# Altium PCB EPS_v6.PcbDoc (part 2 of 2)
Units mm, origin at the board's own origin, x right, y up, seen from the top; angles counter-clockwise.
Board outline 92.5 x 92.5 mm, 2 copper layers (Top Layer, Bottom Layer), stack 1.571 mm thick; 233 components, 118 nets, 725 pads, 167 vias.
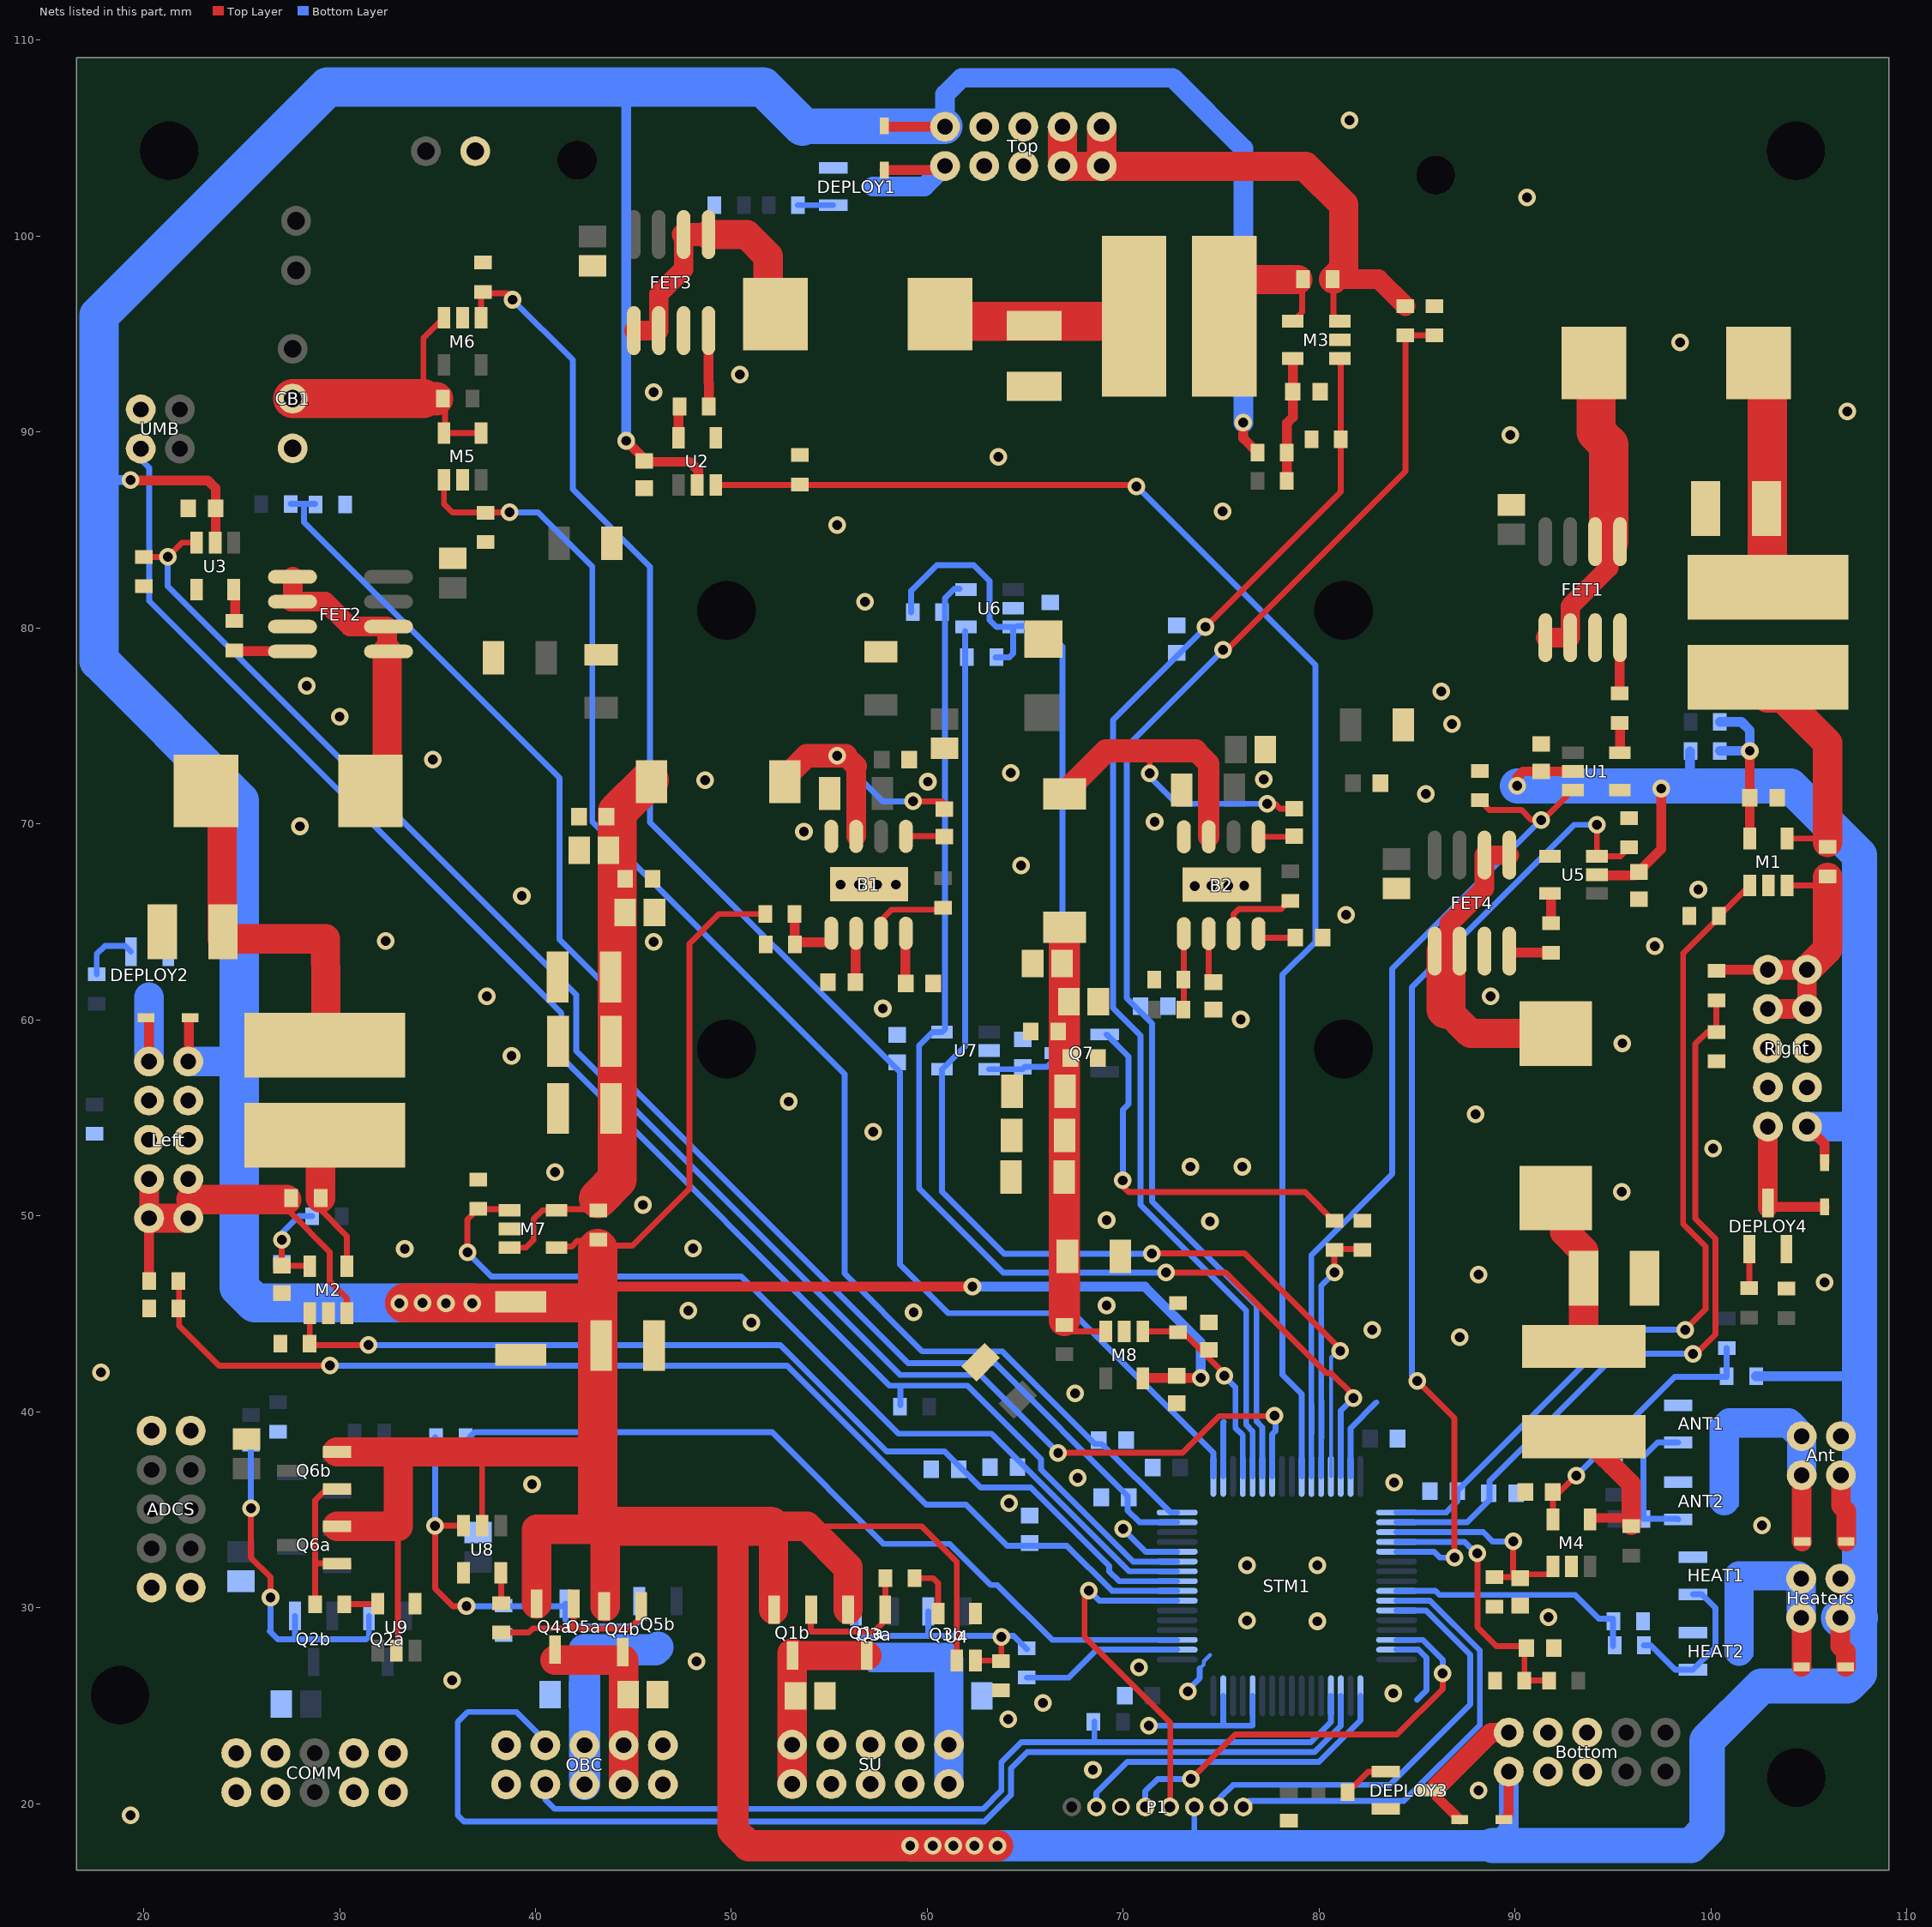
[diagram p2: the nets of this part, all layers, seen from the top]

## Via types
v1: diameter 0.9, hole 0.5, Top Layer to Bottom Layer, 167 vias

## Nets (pads, with @x,y where several pads share a name; then routed paths per layer and width w, separated by ;. In a path a pad name is that pad's centre, name@x,y a point inside that pad or via, vN(x,y) a via of type N, cw(c..) or ccw(c..) an arc to the next point about the centre after c; other vN are vias at no path point) (continued)
GND: ADCS.1 ADCS.2 ADCS.9 ADCS.10 ANT1.2 ANT2.2 B1.4 B2.4 Bottom.5 Bottom.6 Bottom.7 Bottom.8 C2.1 C4.1 C5.1 C6.1 C7.1 C8.1 C9.1 C10.1 C11.1 C12.1 C13.1 C15.1 C17.1 C19.1 C20.1 C22.1 C23.1 C24.1 C27.1 C29.1 C30.2 C31.1 C32.1 C33.1 C34.1 C35.1 C36.1 C37.1 C39.1 C41.1 C42.1 C43.1 C44.2 C45.1 C46.1 C47.1 C48.1 C49.1 C50.1 C51.2 C52.2 C53.2 C54.2 C55.2 C56.1 C57.2 C58.2 C59.1 C60.2 C61.1 C62.1 C63.1 C64.1 C65.1 C66.1 C67.1 C68.1 C69.1 C70.1 C71.1 C72.1 C73.1 C74.2 C75.2 C76.2 C77.2 C78.2 C79.1 C80.1 C81.1 C82.1 C83.1 C84.1 C85.1 C86.2 C87.2 CB1.1 CB2.2 COMM.1 COMM.2 COMM.3 COMM.4 COMM.7 COMM.8 COMM.9 COMM.10 D8.1 DEPLOY1.2 DEPLOY2.2 DEPLOY3.2 DEPLOY4.2 FET1.3 FET2.3 FET3.3 FET4.3 HEAT1.2 HEAT2.2 Left.5 Left.6 Left.7 Left.8 M1.2 M2.2 M3.2 M4.2 M5.2 M6.2 M7.2 M8.2 OBC.1 OBC.2 OBC.9 OBC.10 P1.3 R3.1 R4.2 R5.1 R11.1 R12.2 R13.1 R19.1 R20.2 R21.1 R26.1 R28.2 R29.1 R32.2 R35.1 R36.1 R38.1 R39.1 R45.1 R46.1 R47.1 R48.1 R49.1 R50.1 R51.2 R52.1 R54.2 R57.1 RFB2.1 RFB4.1 Right.5 Right.6 Right.7 Right.8 STM1.12 STM1.18 STM1.31 STM1.47 STM1.60 STM1.63 SU.3 SU.4 SU.5 SU.6 SU.7 SU.8 Top.5 Top.6 Top.7 Top.8 U1.4 U2.4 U3.4 U4.4 U5.4 U6.2 U7.2 U8.4 U9.4 UMB.4 | length 25.1
  Bottom Layer w0.2: 73.9,26.893 74.1,27.093 74.1,27.253 74.434,27.587
  Bottom Layer w0.3: v1(69.99,34.01) 71.15,32.85 STM1.12@72.75,32.85 ; v1(71.3,23.975) 75.075,23.975 ; v1(73.3,25.725) 73.3,25.8 73.9,26.4 73.9,26.893 ; STM1.63@75.1,25.5 75.1,24 75.075,23.975 ; STM1.18@75.1,36.7 75.1,39.45 75.125,39.475 ; STM1.60@76.6,25.5 76.6,23.975 75.075,23.975 ; STM1.31@81.6,36.7 81.6,39.15 82.925,40.475 ; STM1.47@83.95,27.85 85.068,27.85 85.475,27.443 85.475,25.775 85,25.3
  other v1: 19.325,19.4 88.125,20.675 68.45,21.725 64.125,24.3 65.9,25.125 83.775,25.625 35.75,26.3 70.8,26.95 48.225,27.25 79.9,29.3 76.325,29.325 91.7,29.5 76.325,32.15 79.9,32.15 102.6,34.2 64.175,35.325 39.825,36.3 83.825,36.375 67.675,36.625 67.55,40.925 17.825,42 87.175,43.8 82.7,44.175 51.025,44.55 59.3,45.075 47.8,45.15 69.15,45.425 105.8,46.6 88.125,47 33.325,48.3 48.05,48.325 74.425,49.7 69.15,49.775 45.475,50.55 95.45,51.225 41,52.225 73.425,52.5 76.075,52.5 100.1,53.425 57.225,54.275 87.975,55.175 52.925,55.825 38.775,58.15 95.475,58.8 76,60.025 57.725,60.575 37.525,61.2 88.75,61.2 97.125,63.75 46.025,63.975 32.35,64.025 81.375,65.35 39.3,66.325 99.35,66.65 73.65,66.825 74.5,66.85 75.35,66.85 76.175,66.85 55.575,66.9 56.5,66.9 57.425,66.9 58.4,66.9 64.775,67.875 53.7,69.6 27.975,69.875 71.6,70.1 85.45,71.525 60.025,72.15 48.65,72.225 77.175,72.275 64.25,72.6 34.75,73.275 86.775,75.1 30,75.475 86.225,76.75 28.325,77.05 56.825,81.325 55.4,85.25 75.075,85.95 63.625,88.725 89.75,89.85 106.95,91.05 46.025,92.025 50.425,92.925 98.425,94.575 90.6,101.975 81.55,105.9
HEATERS: R25.2 R49.2 STM1.41 | length 13
  Bottom Layer w0.3: STM1.41@83.95,30.85 85.925,30.85 86.125,30.65 93.05,30.65 94.275,29.425 95,29.425 R25.2@95,28.025
I2CRESET: R57.2 R58.2 STM1.28 | length 13.3
  Top Layer w0.305: v1(80.775,47.1) 80.775,48.3 R57.2@82.2,48.3
  Bottom Layer w0.3: STM1.28@80.1,36.7 80.1,38.647 80.11,38.658 80.11,40.542 80.1,40.553 80.1,46.425 v1(80.775,47.1)
I3_3V: C34.2 M8.1 R39.2 STM1.20 | length 10.8
  Top Layer w0.3: M8.1@71,44.1 73,44.1 75.15,41.95 v1(75.15,41.825)
  Bottom Layer w0.3: v1@75.275,41.825 v1(75.15,41.825) 75.725,41.25 75.725,39.165 76.1,38.79 STM1.20@76.1,36.7
I5V: C49.2 M7.1 R35.2 STM1.10 | length 47
  Top Layer w0.3: v1(36.525,48.125) 36.525,49.8 R35.2@37.05,50.325 ; R35.2@37.075,50.35 R35.2@37.05,50.325 ; M7.1@38.625,50.325 R35.2@37.05,50.325
  Bottom Layer w0.3: v1(36.525,48.125) 37.75,46.9 50.5,46.9 58.525,38.875 63.275,38.875 70.3,31.85 STM1.10@72.75,31.85
IBAT+: C32.2 M5.1 R38.2 STM1.16 | length 73.6
  Top Layer w0.3: M5.1@35.325,87.55 35.325,86.325 35.75,85.9 37.15,85.9 v1(38.675,85.9)
  Bottom Layer w0.3: v1(38.675,85.9) 40.125,85.9 42.9,83.125 42.9,70.1 55.775,57.225 55.775,47.05 59.75,43.075 63.825,43.075 68.55,38.35 68.9,38.35 72.4,34.85 STM1.16@72.75,34.85
IBAT-: C33.2 M6.1 R32.1 STM1.17 | length 81.7
  Top Layer w0.3: M6.1@37.225,95.825 37.225,97.05 37.2,97.075 38.575,97.075 38.825,96.825 v1(38.825,96.75)
  Bottom Layer w0.3: v1(38.825,96.75) 41.9,93.675 41.9,87.075 45.85,83.125 45.85,70.075 58.6,57.325 58.6,47.5 61.075,45.025 67.475,45.025 74.6,37.9 STM1.17@74.6,36.7
INCURRENT1: C39.2 M1.1 R5.2 STM1.33 | length 44
  Top Layer w0.3: v1(98.675,44.175) 99.725,45.225 99.725,48.425 98.575,49.575 98.575,63.4 R5.2@100.55,65.375 ; R5.2@100.4,65.3 100.425,65.3 M1.1@101.975,66.85
  Bottom Layer w0.3: STM1.33@83.95,34.85 86.475,34.85 87.05,35.425 C39.2@87.05,35.95 95.275,44.175 v1(98.675,44.175)
INCURRENT2: C48.2 M2.1 R13.2 STM1.9 | length 50.9
  Top Layer w0.3: R13.2@28.475,43.4 v1@31.425,43.4 ; R13.2@28.475,43.475 M2.1@28.475,45.025
  Bottom Layer w0.3: v1(31.475,43.4) 52.5,43.4 57.925,37.975 60.875,37.975 62.725,36.125 65.275,36.125 69.275,32.125 69.275,31.85 69.775,31.35 STM1.9@72.75,31.35
INCURRENT3: C35.2 M3.1 R21.2 STM1.21 | length 64.8
  Top Layer w0.3: v1(74.2,80.05) 81.1,86.95 M3.1@81.1,93.75
  Bottom Layer w0.3: v1@74.212,80.038 69.475,75.3 69.475,60.6 70.875,59.2 70.875,50.55 76.275,45.15 76.275,39.322 76.6,38.997 STM1.21@76.6,36.7
INCURRENT4: C45.2 M4.1 R29.2 STM1.35 | length 11.3
  Top Layer w0.3: R29.2@88.875,31.55 90.075,31.55 C45.2@90.125,31.5 ; v1(89.9,33.375) 89.9,31.7 M4.1@92.075,31.7
  Bottom Layer w0.3: STM1.35@83.95,33.85 88.375,33.85 88.85,33.375 v1(89.9,33.375)
LEFT: Left.1 Left.2 Left.3 Left.4 M2.3 R7.2 R10.2 | length 20.8
  Top Layer w0.3: R7.2@27.5,50.625 27.5,50.15 29.5,48.15 29.5,46.65 30.375,45.775 M2.3@30.375,45.025
  Top Layer w0.5: R10.2@20.275,46.725 Left.2@20.275,49.875
  Top Layer w1: Left.2@20.275,49.875 Left.4@20.275,51.875 ; Left.1@22.275,49.875 Left.3@22.275,51.875
  Top Layer w1.5: Left.2@20.275,49.875 Left.1@22.275,49.875 ; 22.4,50.825 R7.2@27.3,50.825
NetANT1_1: ANT1.1 ANT2.1 R27.1 | length 7
  Bottom Layer w0.3: ANT2.1@98.325,34.5 98.3,34.525 R27.1@96.55,34.525 96.55,37.7 97.275,38.425 ANT1.1@98.325,38.425
NetANT1_3: ANT1.3 ANT2.3 Ant.1 Ant.2 D5.1 | length 13.4
  Top Layer w1: Ant.2@104.625,36.75 104.625,33.4 D5.1@104.65,33.375
  Bottom Layer w1.5: ANT2.3@100.675,35.45 100.675,39.15 100.95,39.425 103.95,39.425 Ant.1@104.625,38.75 Ant.2@104.625,36.75
NetB1_1: B1.1 C25.1 | length 2.2
  Top Layer w0.3: B1.1@58.902,69.365 61.06,69.365 C25.1@61.075,69.35
NetB1_3: B1.3 C25.2 L9.1 | length 14.9
  Top Layer w0.3: v1(59.275,71.15) 60.775,71.15 60.875,71.05 C25.2@60.875,70.75
  Top Layer w1: B1.3@56.362,69.365 56.362,72.938
  Top Layer w1.1: v1@55.825,73.475 56.362,72.938
  Top Layer w1.2: L9.1@52.6,72.225 53.85,73.475 v1(55.4,73.475) v1@55.825,73.475
  Bottom Layer w0.3: v1(55.4,73.475) 57.725,71.15 v1(59.275,71.15)
NetB1_5: B1.5 RFB1.1 RFB2.2 | length 3.1
  Top Layer w0.5: RFB1.1@53.225,65.25 53.225,63.95 B1.5@55.057,63.95
NetB1_6: B1.6 C30.1 | length 2
  Top Layer w0.5: C30.1@56.337,61.925 B1.6@56.337,63.94
NetB1_7: B1.7 R43.2 | length 3.7
  Top Layer w0.3: B1.7@57.632,64.415 57.632,65.082 58.165,65.615 60.435,65.615 R43.2@60.45,65.6
NetB1_8: B1.8 C29.2 | length 2.3
  Top Layer w0.5: C29.2@58.877,61.652 B1.8@58.877,63.94
NetB2_1: B2.1 C38.1 | length 1.8
  Top Layer w0.3: B2.1@76.902,69.34 78.71,69.34 C38.1@78.725,69.325
NetB2_3: B2.3 C38.2 L10.1 | length 21.6
  Top Layer w0.3: v1(71.35,72.575) 71.35,73.675 71.4,73.725 ; v1(77.35,71.025) 77.75,71.025 78,70.775 C38.2@78.725,70.775
  Top Layer w1.1: 73.7,73.725 74.362,73.063 B2.3@74.362,69.34
  Top Layer w1.2: L10.1@67,71.6 69.125,73.725 71.4,73.725 73.7,73.725
  Bottom Layer w0.3: v1(71.35,72.575) 71.35,72.4 72.725,71.025 v1(77.35,71.025)
NetB2_5: B2.5 RFB3.1 RFB4.2 | length 3.6
  Top Layer w0.3: RFB3.1@73.092,60.625 B2.5@73.092,64.19
NetB2_6: B2.6 C44.1 | length 2.4
  Top Layer w0.3: B2.6@74.362,64.19 74.362,61.963 C44.1@74.45,61.875
NetB2_7: B2.7 R44.2 | length 4.2
  Top Layer w0.3: B2.7@75.632,64.39 75.632,65.382 75.9,65.65 78.05,65.65 R44.2@78.525,66.125
NetB2_8: B2.8 C43.2 | length 1.9
  Top Layer w0.3: B2.8@76.902,64.19 C43.2@78.765,64.19
NetBottom_9: Bottom.9 D4.1 DEPLOY3.3 | length 7
  Top Layer w0.5: DEPLOY3.3@85.95,20.8 85.95,20.4 D4.1@87.175,19.175
  Top Layer w1: DEPLOY3.3@85.95,20.8 88.775,23.625 Bottom.9@89.675,23.625
NetC2_2: C2.2 L1.2 L2.1 | length 11.9
  Top Layer w1.5: L2.1@102.525,94.15 L2.1@102.875,93.8
  Top Layer w2: L1.2@102.875,82.375 L2.1@102.875,93.8
NetC8_2: C8.2 M2.5 W3.1 W4.1 | length 6.1
  Top Layer w0.3: v1(27.05,48.775) C8.2@27.05,47.45 M2.5@28.45,47.45
  Bottom Layer w0.3: W3.1@27.05,47.65 v1(27.05,48.775) 27.05,49.1 27.925,49.975 W4.1@28.6,49.975
NetC10_2: C10.2 M1.5 W1.1 W2.1 | length 8.8
  Top Layer w0.5: M1.5@101.975,69.25 C10.2@101.975,71.325 v1(101.975,73.725)
  Bottom Layer w0.5: W1.1@100.45,73.725 101.875,73.725 101.925,73.775 v1(101.975,73.725) 101.975,74.775 101.55,75.2 W2.1@100.45,75.2
NetC11_2: C11.2 M4.5 W7.1 W8.1 | length 14
  Top Layer w0.3: M4.5@91.925,34.5 91.925,35.55 93.1,36.725 v1(93.125,36.725)
  Bottom Layer w0.3: v1(93.125,36.725) 93.125,36.75 98.15,41.775 W7.1@100.8,41.775 ; W7.1@100.8,41.8 W8.1@100.8,43.25
NetC13_2: C13.2 M3.5 W5.1 W6.1 | length 6.4
  Top Layer w0.5: W6.1@78.35,87.5 W5.1@78.35,88.95 78.35,90.45 78.65,90.75 C13.2@78.65,92.05 M3.5@78.65,93.75
NetC15_2: C15.2 L3.2 L4.1 | length 18.7
  Top Layer w1.5: L4.1@23.025,71.7 24,70.725 24,64.125 29.275,64.125 29.325,58.775 L3.2@29.25,58.7
NetC19_2: C19.2 L5.2 L6.1 | length 10.2
  Top Layer w1.5: L5.2@69.775,97.15 L5.2@70.45,97.825
  Top Layer w2: L6.1@61.025,95.65 65.375,95.65 L5.2@70.3,95.65
NetC22_2: C22.2 L7.2 L8.1 | length 9.3
  Top Layer w1: L8.1@91.625,50.025 L8.1@92.525,50.925
  Top Layer w1.5: L8.1@92.525,50.925 92.525,49.175 93.5,48.2 L7.2@93.5,43.325
NetC27_2: C27.2 C76.1 C77.1 C78.1 C82.2 C83.2 C86.1 L9.2 M7.3 M7.5 R37.2 | length 28.4
  Top Layer w0.3: M7.3@38.675,48.375 39.525,48.375 39.9,48.75 39.9,49.825 40.35,50.275 M7.5@41.075,50.275 ; M7.5@41.025,50.325 R37.2@43.2,50.325
  Top Layer w2: 43.2,50.875 44.175,51.85 44.175,70.6 L9.2@45.8,72.225
NetC41_2: C41.2 C71.2 C72.2 C73.2 C79.2 C84.2 C85.2 C87.1 L10.2 M8.3 R40.2 | length 22.2
  Top Layer w0.3: R40.2@67,44.25 67.15,44.1 M8.3@69.1,44.1
  Top Layer w1.6: R40.2@67,44.65 L10.2@67,64.725
NetC55_1: C55.1 C60.1 Q7.3 R59.1 R60.1 U6.3 U7.3 | length 39.2
  Bottom Layer w0.3: R59.1@59.175,80.8 59.175,81.9 60.475,83.2 62.375,83.2 63.175,82.4 63.175,80.4 63.525,80.05 U6.3@64.375,80.05 64.375,78.7 64.175,78.5 R60.1@63.475,78.5 ; U7.3@63.15,57.475 64.85,57.475 64.975,57.6 66.1,57.6 66.9,58.4 66.9,79.05 65.85,80.1 U6.3@64.6,80.1
NetCB1_2: CB1.2 M5.4 M5.5 M6.3 R31.2 | length 15.6
  Top Layer w0.3: 34.275,91.7 34.275,94.775 M6.3@35.325,95.825 ; R31.2@35.425,91.7 35.375,91.65 35.375,89.95 M5.4@37.275,89.95
  Top Layer w1.7: 34.275,91.7 R31.2@34.95,91.7
  Top Layer w2: CB1.2@27.6,91.7 34.275,91.7
NetD1_1: D1.1 DEPLOY1.3 Top.10 | length 7.3
  Top Layer w0.5: D1.1@57.8,103.375 60.7,103.375 Top.10@60.9,103.575
  Bottom Layer w1: DEPLOY1.3@57.225,102.525 59.85,102.525 Top.10@60.9,103.575
NetD2_1: D2.1 DEPLOY2.3 Left.10 | length 5.5
  Top Layer w0.5: Left.10@20.275,57.875 D2.1@20.275,60.1
  Bottom Layer w1.5: Left.10@20.275,57.875 DEPLOY2.3@20.275,61.15
NetD3_1: D3.1 DEPLOY4.3 Right.9 | length 7
  Top Layer w0.5: DEPLOY4.3@102.9,50.425 102.925,50.45 D3.1@105.8,50.45
  Top Layer w1: DEPLOY4.3@102.9,50.425 Right.9@102.9,54.55
NetD6_1: D6.1 HEAT1.3 HEAT2.3 Heaters.1 Heaters.2 | length 11.6
  Top Layer w1: Heaters.2@104.6,29.475 104.625,29.45 D6.1@104.625,26.975
  Bottom Layer w1.5: HEAT2.3@101.425,27.775 HEAT1.3@101.425,31.625 104.45,31.625 Heaters.1@104.6,31.475 Heaters.2@104.6,29.475
NetDEPLOY1_1: DEPLOY1.1 R8.1 | length 1.8
  Bottom Layer w0.3: R8.1@53.4,101.575 DEPLOY1.1@55.2,101.575
NetDEPLOY2_2: DEPLOY2.1 R9.1 | length 3.1
  Bottom Layer w0.3: R9.1@17.6,62.325 17.6,63.35 18.025,63.775 19.05,63.775 DEPLOY2.1@19.35,63.475
NetDEPLOY3_1: DEPLOY3.1 R17.1 | length 2.4
  Top Layer w0.3: R17.1@81.45,20.575 82.5,21.625 DEPLOY3.1@83.4,21.625
NetDEPLOY4_1: DEPLOY4.1 R18.1 | length 2
  Top Layer w0.3: R18.1@101.95,46.3 DEPLOY4.1@101.95,48.3
NetFET1_1: FET1.1 FET1.2 FET1.5 FET1.6 L2.2 | length 17
  Top Layer w1: FET1.1@91.545,79.5 FET1.2@92.815,79.5 92.815,81.115 94.775,83.075 94.775,84.4
  Top Layer w2: L2.2@94.125,94.15 94.125,90 94.775,89.35 94.775,84.4
NetFET1_4: FET1.4 R6.2 | length 2.9
  Top Layer w0.5: R6.2@95.325,76.65 95.325,79.47 FET1.4@95.355,79.5
NetFET2_1: FET2.1 FET2.2 FET2.5 FET2.6 L4.2 | length 15.5
  Top Layer w1: FET2.2@27.525,81.335 29.265,81.335 30.525,80.075 FET2.6@32.415,80.075 ; FET2.2@27.61,81.35 FET2.1@27.61,82.62 ; L4.2@31.425,71.7 L4.2@32.425,72.7 ; FET2.5@32.425,78.795 FET2.6@32.425,80.065
  Top Layer w1.5: L4.2@32.425,72.7 FET2.5@32.425,78.795
NetFET2_4: FET2.4 R14.2 | length 3
  Top Layer w0.5: R14.2@24.625,78.81 FET2.4@27.61,78.81
NetFET3_1: FET3.1 FET3.2 FET3.5 FET3.6 L6.2 | length 14.6
  Top Layer w1: FET3.1@45.02,95.175 FET3.2@46.29,95.175 46.29,97.04 47.56,98.31 FET3.6@47.56,100.075
  Top Layer w1.2: FET3.6@47.56,100.075 FET3.5@48.83,100.075
  Top Layer w1.5: FET3.5@48.83,100.075 50.775,100.075 51.875,98.975 51.875,96.4 L6.2@52.25,96.025
NetFET3_4: FET3.4 R22.2 | length 3.9
  Top Layer w0.5: 48.825,92.525 48.85,92.5 R22.2@48.85,91.2 ; 48.83,92.57 FET3.4@48.83,95.175
NetFET4_1: FET4.1 FET4.2 FET4.5 FET4.6 L8.2 | length 15.4
  Top Layer w1: 86.625,64.04 86.625,64.9 88.435,66.71 FET4.6@88.435,68.4 FET4.5@89.705,68.4
  Top Layer w1.5: 86.475,60.55 87.725,59.3 L8.2@92.075,59.3
  Top Layer w2: 86.475,60.55 86.475,62.763 86.475,63.5
NetFET4_4: FET4.4 R30.2 | length 1.9
  Top Layer w0.5: FET4.4@89.78,63.425 R30.2@91.65,63.425
NetHEAT1_1: HEAT1.1 HEAT2.1 R25.1 | length 8.1
  Bottom Layer w0.3: R25.1@96.575,28.075 96.925,28.075 98.175,26.825 HEAT2.1@99.075,26.825 100.225,27.975 100.225,29.975 99.525,30.675 HEAT1.1@99.075,30.675
NetL1_1: L1.1 M1.4 R1.1 | length 11.3
  Top Layer w0.3: M1.4@103.875,69.25 105.75,69.25 R1.1@105.95,69.05
  Top Layer w1.5: L1.1@102.875,76.425 103.65,76.425 105.95,74.125 R1.1@105.95,69.05
NetL3_1: L3.1 M2.4 R7.1 | length 7.6
  Top Layer w0.3: R7.1@29.025,50.9 29.025,50.3 30.375,48.95 M2.4@30.375,47.425
  Top Layer w1: L3.1@26.375,54.2 L3.1@26.775,53.8
  Top Layer w1.5: R7.1@29.025,50.9 L3.1@29.025,53.875
NetL5_1: L5.1 M3.4 R15.1 | length 6.1
  Top Layer w0.3: M3.4@78.65,95.65 79.125,96.125 R15.1@79.125,97.8
  Top Layer w1.5: L5.1@75.1,97.775 R15.1@78.9,97.775
NetL7_1: L7.1 M4.4 R23.1 | length 7.2
  Top Layer w0.5: M4.4@93.85,34.575 95.55,34.575
  Top Layer w1: L7.1@93.5,38.725 95.925,36.3 R23.1@95.925,34.2
NetQ1a_1: Q1a.1 Q1b.1 R33.1 | length 7
  Top Layer w0.3: Q1b.1@54.05,29.575 54.05,28.775 57.275,28.775 57.85,29.35 57.85,29.575 R33.1@57.85,31.5
NetQ2a_1: Q2a.1 Q2b.1 R41.1 | length 17.5
  Top Layer w0.3: v1(25.475,35.075) 25.475,32.55 26.475,31.55 v1(26.475,30.525)
  Bottom Layer w0.3: v1(25.475,35.075) R41.1@25.475,38.325 ; v1(26.475,30.525) 26.475,28.847 26.426,28.799 26.85,28.375 27.725,28.375 ; Q2b.1@27.725,29.575 27.725,28.375 ; Q2a.1@31.5,29.575 31.5,28.525 31.35,28.375 27.725,28.375
NetQ4a_1: Q4a.1 Q4b.1 R55.1 | length 9.6
  Top Layer w0.3: R55.1@38.425,28.55 R55.1@38.25,28.725 39.65,28.725 39.862,28.937 41.95,28.937 ; Q4a.1@41.95,30.2 41.95,28.937 ; Q4b.1@45.4,30.075 45.4,29.525 44.8,28.925 41.962,28.925 41.95,28.937
NetQ6a_1: Q6a.1 Q6b.1 R63.1 | length 7.8
  Top Layer w0.3: R63.1@28.75,30.175 28.75,32.25 ; Q6a.1@29.875,32.25 28.75,32.25 ; Q6b.1@29.875,36.05 29.325,36.05 28.75,35.475 28.75,32.25
NetQ7_1: Q7.1 R58.1 | length 19.9
  Top Layer w0.305: v1(69.975,51.8) 69.975,51.5 70.275,51.2 79.275,51.2 R58.1@80.775,49.7
  Bottom Layer w0.305: Q7.1@69.15,59.25 70.275,58.125 70.275,55.7 69.975,55.4 v1(69.975,51.8)
NetR6_1: R6.1 U1.5 | length 1.6
  Top Layer w0.5: U1.5@95.35,73.625 R6.1@95.35,75.225
NetR14_1: R14.1 U3.5 | length 1.6
  Top Layer w0.5: U3.5@24.625,81.9 24.675,81.85 R14.1@24.675,80.35
NetR22_1: R22.1 U2.5 | length 1.6
  Top Layer w0.5: U2.5@47.3,89.7 47.3,91.25 R22.1@47.325,91.275
NetR30_1: R30.1 U5.5 | length 1.5
  Top Layer w0.5: R30.1@91.825,64.925 U5.5@91.825,66.425
NetR33_2: R33.2 U4.5 | length 2.9
  Top Layer w0.3: R33.2@59.35,31.5 60.3,31.5 60.55,31.25 U4.5@60.55,29.7
NetR55_2: R55.2 U8.5 | length 1.6
  Top Layer w0.3: U8.5@38.225,31.775 38.25,31.75 R55.2@38.25,30.225
NetR63_2: R63.2 U9.5 | length 1.7
  Top Layer w0.3: R63.2@30.25,30.175 U9.5@31.925,30.175
NRST: P1.5 STM1.7 | length 17.7
  Top Layer w0.3: v1(68.25,30.875) 68.025,30.65 68.025,28.5 72.4,24.125 P1.5@72.4,19.825
  Bottom Layer w0.3: v1(68.25,30.875) 68.775,30.35 STM1.7@72.75,30.35
OBC_3_3V: C37.2 OBC.5 OBC.6 Q5a.3 Q5b.3 | length 11.2
  Bottom Layer w1.6: Q5a.3@42.475,27.85 Q5a.3@42.5,27.85 ; OBC.5@42.5,20.975 OBC.6@42.5,22.975 ; OBC.6@42.5,22.525 Q5a.3@42.5,27.85 ; Q5b.3@46.25,27.975 46.125,27.85 Q5a.3@42.5,27.85
OBC_5V: C57.1 OBC.7 OBC.8 Q4a.3 Q4b.3 | length 9.8
  Top Layer w1.5: Q4a.3@41,27.325 44.5,27.325 44.5,23 OBC.7@44.5,21
OBC_ONOFF: R56.2 STM1.3 | length 40.9
  Bottom Layer w0.3: R56.2@36.4,38.45 36.9,38.95 52.075,38.95 57.775,33.25 61.15,33.25 63.25,31.15 63.575,31.15 66.375,28.35 STM1.3@72.75,28.35
OBC_ONOFFF2: Q5a.1 Q5b.1 R54.1 R56.1 U8.3 | length 22.1
  Top Layer w0.3: U8.3@36.325,34.175 v1(34.875,34.175) 34.875,30.975 35.775,30.075 v1(36.475,30.075)
  Bottom Layer w0.3: v1(34.875,34.175) R56.1@34.875,38.7 ; v1(36.475,30.075) Q5a.1@41.525,30.075 ; Q5a.1@41.525,30.2 Q5a.1@41.525,30.075 ; Q5b.1@45.3,30.325 45.3,29.325 45.025,29.05 41.825,29.05 41.525,29.35 Q5a.1@41.525,30.075
PA13: P1.4 STM1.46 | length 22.4
  Top Layer w0.3: v1(73.45,21.25) 75.725,23.525 83.975,23.525 86.3,25.85 v1(86.3,26.65)
  Bottom Layer w0.3: P1.4@71.125,19.825 71.125,20.625 71.75,21.25 v1(73.45,21.25) ; STM1.46@83.95,28.35 85.275,28.35 86.3,27.325 v1(86.3,26.65)
PA14: P1.2 STM1.49 | length 17
  Bottom Layer w0.3: P1.2@68.625,19.825 68.625,20.55 70.2,22.125 79.975,22.125 82.1,24.25 STM1.49@82.1,25.5
PC3: R62.1 STM1.11 UMB.3 | length 83.3
  Bottom Layer w0.3: UMB.3@19.95,89.15 19.95,88.5 20.275,88.175 20.275,81.375 41.325,60.325 41.325,58.075 58.075,41.325 62.05,41.325 65.8,37.575 65.8,37.057 70.507,32.35 STM1.11@72.75,32.35 ; R62.1@58.625,40.325 58.625,41.325
PWM1: R4.1 STM1.27 U1.3 | length 44.1
  Top Layer w0.3: R4.1@88.2,71.2 88.7,70.7 90.325,70.7 90.825,70.2 v1(91.325,70.2) v1@91.55,70.425 ; v1@91.65,70.425 U1.3@92.95,71.725
  Bottom Layer w0.3: STM1.27@79.6,36.7 79.6,38.854 79.61,38.865 79.61,40.335 79.6,40.346 79.6,48 83.725,52.125 83.725,62.6 v1(91.325,70.2)
PWM2: R12.1 STM1.23 U3.3 | length 85.1
  Top Layer w0.3: R12.1@19.95,83.625 v1(21.225,83.625) 21.95,84.35 U3.3@22.775,84.35 ; v1(66.675,37.9) 73.025,37.9 74.9,39.775 77.7,39.775 v1(77.725,39.8)
  Bottom Layer w0.3: v1(21.225,83.625) 21.225,82.125 42.075,61.275 42.075,58.4 58.6,41.875 62.7,41.875 v1(66.675,37.9) ; STM1.23@77.6,36.7 77.6,38.85 77.775,39.025 77.775,39.75 v1(77.725,39.8)
PWM3: R20.1 STM1.26 U2.3 | length 76.9
  Top Layer w0.3: U2.3@49.2,87.3 70.6,87.3 v1(70.675,87.225)
  Bottom Layer w0.3: v1(70.675,87.225) 79.8,78.1 79.8,63.975 78.125,62.3 78.125,41.875 79.1,40.9 79.1,40.138 79.11,40.128 79.11,39.072 79.1,39.062 STM1.26@79.1,36.7
PWM4: R28.1 STM1.37 U5.3 | length 49.4
  Top Layer w0.3: v1(85,41.575) 86.9,39.675 v1(86.9,32.55) ; v1(94.175,69.95) U5.3@94.175,68.35 95.375,68.35 R28.1@95.825,68.8
  Bottom Layer w0.3: STM1.37@83.95,32.85 85.875,32.85 86.175,32.55 v1(86.9,32.55) ; v1(85,41.575) 84.725,41.85 84.725,61.675 93,69.95 v1(94.175,69.95)
RIGHT: M1.3 R1.2 R2.2 Right.1 Right.2 Right.3 Right.4 | length 15.9
  Top Layer w0.3: M1.3@103.875,66.85 105.525,66.85 R1.2@105.95,67.275
  Top Layer w0.5: R2.2@100.45,62.55 Right.1@102.9,62.55
  Top Layer w1: Right.3@102.9,60.55 Right.4@104.9,60.55 Right.2@104.9,62.55 Right.1@102.9,62.55
  Top Layer w1.5: Right.2@104.9,62.55 105.95,63.6 R1.2@105.95,67.275
RX: OBC.3 R61.2 STM1.52 | length 46.2
  Bottom Layer w0.3: OBC.3@40.5,20.975 40.5,20.2 40.975,19.725 62.85,19.725 63.775,20.65 63.775,22.1 64.8,23.125 68.55,23.125 ; R61.2@68.525,24.175 68.525,23.15 68.55,23.125 ; STM1.52@80.6,25.5 80.6,24.164 79.561,23.125 68.55,23.125
RX2: P1.7 STM1.43 | length 22.5
  Bottom Layer w0.3: P1.7@74.875,19.825 74.875,20.225 74.975,20.325 75.6,20.95 83.6,20.95 87.7,25.05 87.7,27.6 85.45,29.85 STM1.43@83.95,29.85
SCL: R60.2 STM1.29 U6.4 U7.4 | length 59.5
  Top Layer w0.305: v1(71.45,48.075) 76.2,48.075 81.075,43.2 v1(81.075,43.1)
  Bottom Layer w0.2: STM1.29@80.6,36.7 80.6,42.775 v1@80.925,43.1
  Bottom Layer w0.305: U6.4@61.925,79.825 61.925,58.65 U7.4@60.75,57.475 60.75,51.225 63.927,48.048 71.423,48.048 v1(71.45,48.075) ; v1@80.925,43.1 v1(81.075,43.1)
SDA: R59.2 STM1.30 U6.5 U7.5 | length 63.1
  Top Layer w0.3: v1(72.175,47.1) 75.225,47.1 80.35,41.975 80.6,41.975 81.725,40.85 81.575,40.7 v1(81.75,40.7)
  Bottom Layer w0.3: U6.5@61.65,82 61.375,82 60.9,81.525 60.9,59.525 U7.5@60.75,59.375 60.275,59.375 59.575,58.675 59.575,51.4 63.875,47.1 v1(72.175,47.1) ; STM1.30@81.1,36.7 81.1,40.05 v1(81.75,40.7)
SU_3_3V: C56.2 Q3a.3 Q3b.3 SU.1 SU.2 | length 10.2
  Bottom Layer w1.5: Q3a.3@57.3,27.45 Q3b.3@61,27.45 61.1,27.35 SU.2@61.1,23 SU.1@61.1,21
SU_5V: C24.2 Q1a.3 Q1b.3 SU.9 SU.10 | length 10.4
  Top Layer w1.5: SU.9@53.1,21 SU.10@53.1,23 Q1b.3@53.1,27.675 ; Q1b.3@53.125,27.55 Q1a.3@56.9,27.55
SU_ONOFF: R42.2 STM1.2 | length 8.3
  Bottom Layer w0.3: R42.2@65.075,26.425 67.225,26.425 68.65,27.85 STM1.2@72.75,27.85
SU_ONOFF2: Q3a.1 Q3b.1 R42.1 R51.1 U4.3 | length 13.8
  Top Layer w0.3: U4.3@62.45,27.3 R51.1@63.675,27.3 ; R51.1@63.75,27.225 63.725,27.25 63.775,27.3 v1(63.775,28.5)
  Bottom Layer w0.3: Q3a.1@56.35,29.675 56.35,28.85 56.65,28.55 60.125,28.55 ; Q3b.1@60.05,29.8 60.05,28.625 60.125,28.55 ; R42.1@65.075,27.875 64.4,28.55 60.125,28.55
TOP: M3.3 R15.2 R16.2 Top.1 Top.2 Top.3 Top.4 | length 29.7
  Top Layer w0.3: R15.2@80.725,97.8 80.725,95.975 M3.3@81.05,95.65
  Top Layer w1: R15.2@80.725,97.8 83.025,97.8 R16.2@84.4,96.425
  Top Layer w1.5: Top.3@66.9,105.55 66.9,103.55 Top.2@68.9,103.55 ; Top.1@68.9,105.55 Top.2@68.9,103.55 ; R15.2@80.725,97.8 81.25,98.325 81.25,101.6 79.3,103.55 Top.2@68.9,103.55
TX: OBC.4 STM1.51 | length 59.8
  Bottom Layer w0.3: OBC.4@40.5,23.05 40.475,23.075 40.475,23.225 39.025,24.675 36.55,24.675 36.025,24.15 36.025,19.4 36.35,19.075 62.907,19.075 64.275,20.443 64.275,21.8 65.1,22.625 79.768,22.625 81.1,23.957 STM1.51@81.1,25.5
TX2: P1.8 STM1.42 | length 22.9
  Bottom Layer w0.3: P1.8@76.125,19.825 76.425,20.125 84.325,20.125 88.2,24 88.2,27.807 85.657,30.35 84.825,30.35 STM1.42@83.95,30.35
VBAT: C31.2 R34.1 R36.2 STM1.15 | length 75.4
  Bottom Layer w0.3: 63.45,42.475 70.225,35.7 70.225,34.95 70.825,34.35 STM1.15@72.75,34.35
  Bottom Layer w0.305: R34.1@27.5,86.325 28.175,86.325 ; R36.2@28.75,86.325 28.175,86.325 ; 63.45,42.475 59.025,42.475 43.725,57.775 43.725,61.6 41.225,64.1 41.225,72.35 28.175,85.4 28.175,86.325
VCC: Ant.3 Ant.4 Bottom.10 C5.2 C6.2 C7.2 C9.2 C12.2 C74.1 C75.1 D1.2 D2.2 D3.2 D4.2 D5.2 D6.2 Heaters.3 Heaters.4 Left.9 M7.4 M8.5 P1.6 Q1a.2 Q1b.2 Q4a.2 Q4b.2 Q6a.2 Q6b.2 R37.1 RFB1.2 Right.10 Top.9 U1.2 U2.2 U3.2 U4.2 U5.2 U8.2 U9.2 W1.2 W3.2 W5.2 W7.2 | length 532.6
  Top Layer w0.3: U9.2@32.9,27.8 32.975,27.875 32.975,34.125 33,34.15 ; U8.2@37.275,34.175 37.275,37.95 ; M7.4@41.025,48.425 41.85,48.425 42.15,48.725 R37.1@42.95,48.725 ; R37.1@43.6,48.475 44.95,48.475 47.85,51.375 47.85,63.875 49.375,65.4 51.575,65.4 RFB1.2@51.725,65.25 ; 53.85,34.15 59.7,34.15 61.5,32.35 U4.2@61.5,27.3
  Top Layer w0.5: v1(19.325,87.55) 19.325,87.525 23.275,87.525 23.675,87.125 U3.2@23.675,84.3 ; Left.9@22.275,57.875 22.3,57.9 D2.2@22.3,59.925 ; 43.525,46.375 v1(62.3,46.375) ; v1(44.625,89.55) 45.7,88.475 47.875,88.475 48.3,88.05 U2.2@48.3,87.275 ; D1.2@57.875,105.575 Top.9@60.9,105.575 ; M8.5@71,41.7 71.025,41.725 v1(73.95,41.725) ; v1(76.125,90.475) 76.125,89.675 W5.2@76.85,88.95 ; D4.2@89.425,19.175 89.675,19.425 Bottom.10@89.675,21.625 ; v1(90.1,71.95) 90.1,72.375 90.4,72.675 C7.2@91.325,72.675 U1.2@92.95,72.675 ; U5.2@94.225,67.375 96.125,67.375 97.45,68.7 v1(97.45,71.8) ; Right.10@104.9,54.55 105.8,53.65 D3.2@105.8,52.7
  Top Layer w1: Heaters.4@106.6,29.475 106.6,28.025 106.875,27.75 D6.2@106.875,26.975 ; Ant.4@106.625,36.75 106.625,35.2 106.9,34.925 D5.2@106.9,33.375
  Top Layer w1.5: Q6a.2@29.875,34.15 33,34.15 33,37.95 ; Q6b.2@29.875,37.95 33,37.95 ; Q4a.2@40.05,30.175 40.05,34 43.375,34 43.525,34.15 ; 43.175,34.5 43.525,34.15 ; 43.175,37.5 42.725,37.95 37.275,37.95 33,37.95 ; Q4b.2@43.55,30.05 43.55,34.125 43.525,34.15 ; Q1b.2@52.15,29.9 52.15,34 52,34.15 53.85,34.15 55.95,32.05 Q1a.2@55.95,29.9
  Top Layer w1.6: 50.075,34.15 50.075,18.65 50.875,17.85 v1(63.575,17.85)
  Top Layer w2: v1@33.325,45.55 43.125,45.55 43.175,45.6 ; 43.175,34.5 43.175,37.5 43.175,45.6 ; 43.175,48.325 43.175,45.6 ; 43.525,34.15 50.075,34.15 52,34.15
  Bottom Layer w0.3: 73.625,17.875 P1.6@73.625,19.825
  Bottom Layer w0.5: 17.725,87.15 18.125,87.55 ; 17.725,87.55 v1(19.325,87.55) ; v1(44.625,89.55) 44.625,107.675 44.875,107.925 ; v1(62.3,46.375) 71.1,46.375 73.95,43.525 v1(73.95,41.725) ; v1@97.05,71.925 97.175,71.8 v1(97.45,71.8) ; 98.925,72 W1.2@98.925,73.7 ; W7.2@102.3,41.8 107.35,41.8 107.375,41.775 107.575,41.975
  Bottom Layer w1: Top.9@60.9,105.6 60.9,107.225 61.75,108.075 72.525,108.075 76.125,104.475 v1(76.125,90.475) ; 88.85,17.85 89.675,18.675 Bottom.10@89.675,21.625 ; 107.475,54.55 107.575,54.65 ; 107.525,29.475 107.575,29.425
  Bottom Layer w1.5: Left.9@22.275,57.875 24.7,57.875 ; Right.10@104.9,54.55 107.475,54.55
  Bottom Layer w1.6: v1(59.125,17.85) 88.85,17.85
  Bottom Layer w1.8: 53.625,105.6 Top.9@60.9,105.6 ; 88.85,17.85 98.975,17.85 99.8,18.675 99.8,23.225 102.575,26 106.95,26 107.575,26.625 107.575,29.425 107.575,41.975 107.575,54.65 107.575,68.4 104.05,71.925 97.05,71.925 v1@90.125,71.925
  Bottom Layer w2: 24.7,57.875 24.875,57.7 ; v1@36.775,45.55 25.675,45.55 24.875,46.35 24.875,57.7 ; 53.625,105.6 51.625,107.6 29.375,107.6 17.725,95.95 17.725,78.325 24.875,71.175 24.875,57.7 ; Heaters.4@106.6,29.475 107.525,29.475
  other v1: 60.275,17.85 61.325,17.85 62.4,17.85 33.05,45.525 35.425,45.525 36.775,45.525 34.225,45.55
VIN1: C42.2 R2.1 R3.2 STM1.34 | length 39
  Top Layer w0.3: v1(99.075,42.95) 99.232,42.95 100.225,43.943 100.225,48.825 99.2,49.85 99.2,58.775 99.8,59.375 R3.2@100.275,59.375 R2.1@100.275,61
  Bottom Layer w0.3: STM1.34@83.95,34.35 87.55,34.35 88.7,35.5 88.7,36.45 95.2,42.95 v1(99.075,42.95)
VIN2: C47.2 R10.1 R11.2 STM1.8 | length 58.8
  Top Layer w0.3: R10.1@21.8,46.675 21.8,45.2 21.8,44.4 23.85,42.35 v1(29.5,42.35)
  Bottom Layer w0.3: v1(29.5,42.35) 52.843,42.35 59.943,35.25 61.978,35.25 64.078,33.15 67.125,33.15 69.425,30.85 STM1.8@72.75,30.85
VIN3: C36.2 R16.1 R19.2 STM1.22 | length 68.6
  Top Layer w0.3: v1(75.1,78.875) 75.275,78.875 84.4,88 R16.1@84.4,94.925 R19.2@85.875,94.925
  Bottom Layer w0.3: v1(75.1,78.875) 70.175,73.95 70.175,61.1 71.475,59.8 71.475,50.725 76.8,45.4 76.8,39.504 77.1,39.204 STM1.22@77.1,36.7
VIN4: C46.2 R24.1 R26.2 STM1.36 | length 13.9
  Top Layer w0.3: v1(88.075,32.775) 88.075,28.994 89.044,28.025 90.475,28.025 R26.2@90.475,26.275 R24.1@91.725,26.275
  Bottom Layer w0.3: STM1.36@83.95,33.35 87.425,33.35 88,32.775 v1(88.075,32.775)
pads on no net: BAT1.1 BAT1.2 BAT1.3 BAT1.4 STM1.1 STM1.14 STM1.24 STM1.38 STM1.44 STM1.50 STM1.53 STM1.54 STM1.55 STM1.56 STM1.57 STM1.58 STM1.59 STM1.61 STM1.62 U1.1 U2.1 U3.1 U4.1 U5.1 U6.1 U7.1 U8.1 U9.1
copper on no net: | length 132.2
  Top Layer w0.254: 16.775,23.3 ccw(c18.773,25.55) 16.775,27.8 16.775,23.3 ; 24.343,104.35 ccw(c21.3,104.35) 24.343,104.35 ; 107.368,104.35 ccw(c104.325,104.35) 107.368,104.35 ; 107.393,21.325 ccw(c104.35,21.325) 107.393,21.325
  Bottom Layer w0.254: 16.777,23.275 ccw(c18.775,25.525) 16.777,27.775 16.777,23.275 ; 107.368,104.35 ccw(c104.325,104.35) 107.368,104.35 ; 107.393,21.325 ccw(c104.35,21.325) 107.393,21.325

## Polygon pours and split planes (outlines as drawn)
GND on Top Layer "Top Layer-No Net" (solid, pour order 4): 16.575,109.1 109.075,109.1 109.075,16.6 16.575,16.6
GND on Bottom Layer "Top Layer-No Net" (solid, pour order 6): 16.575,109.1 109.075,109.1 109.075,16.6 16.575,16.6

## Silkscreen, mask and mechanical layers (free items; w line width, h text height)
Top Overlay:
  drawing of 2582 lines, arcs and shapes, not listed
  text "LEMEC" at 50.3,37.85 h1.52